# Altium PCB d202.PcbDoc (part 1 of 2)
Units mm, origin at the board's own origin, x right, y up, seen from the top; angles counter-clockwise.
Board outline 40.5 x 50 mm, 2 copper layers (Top Layer, Bottom Layer), stack 1.551 mm thick; 77 components, 78 nets, 375 pads, 19 vias.
Unrouted connection lines stored in the file: 195.
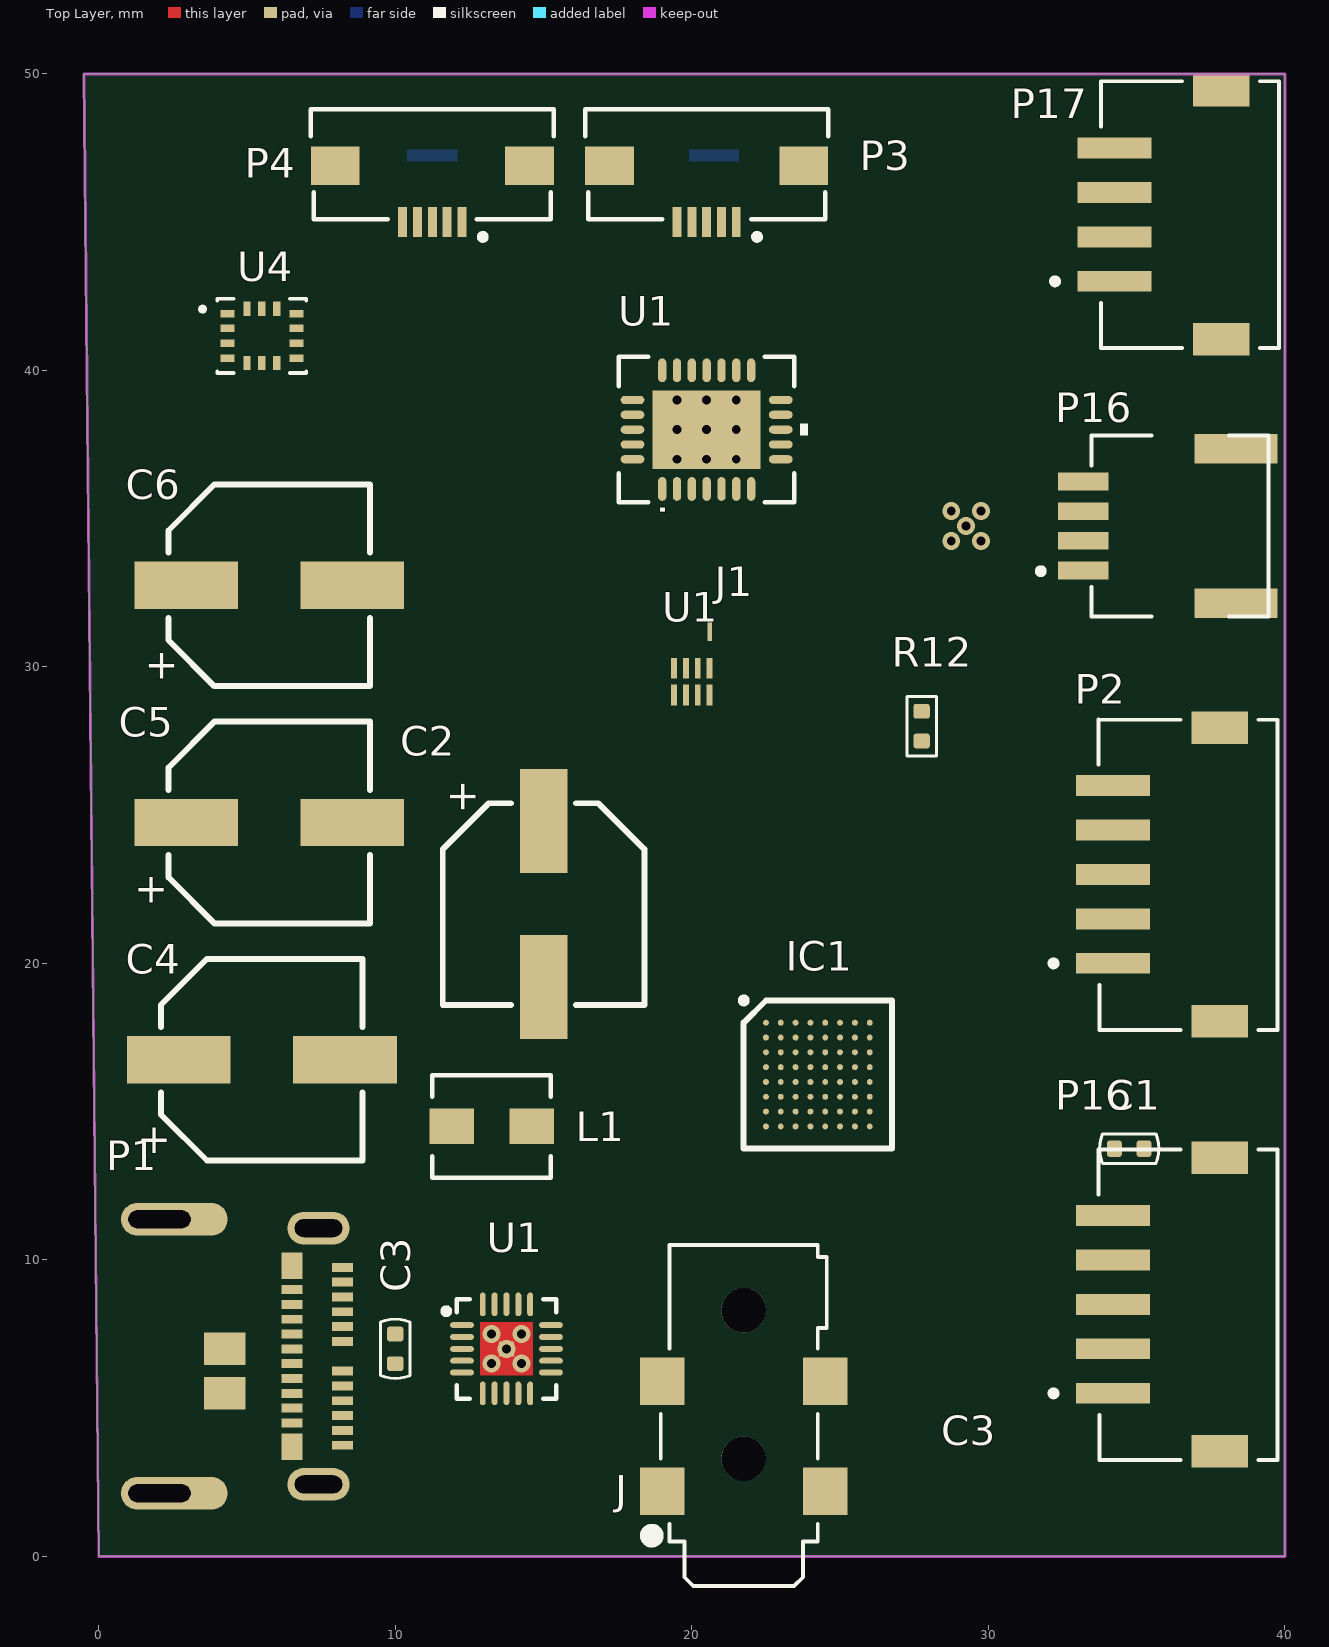
[diagram p0: Top Layer view]
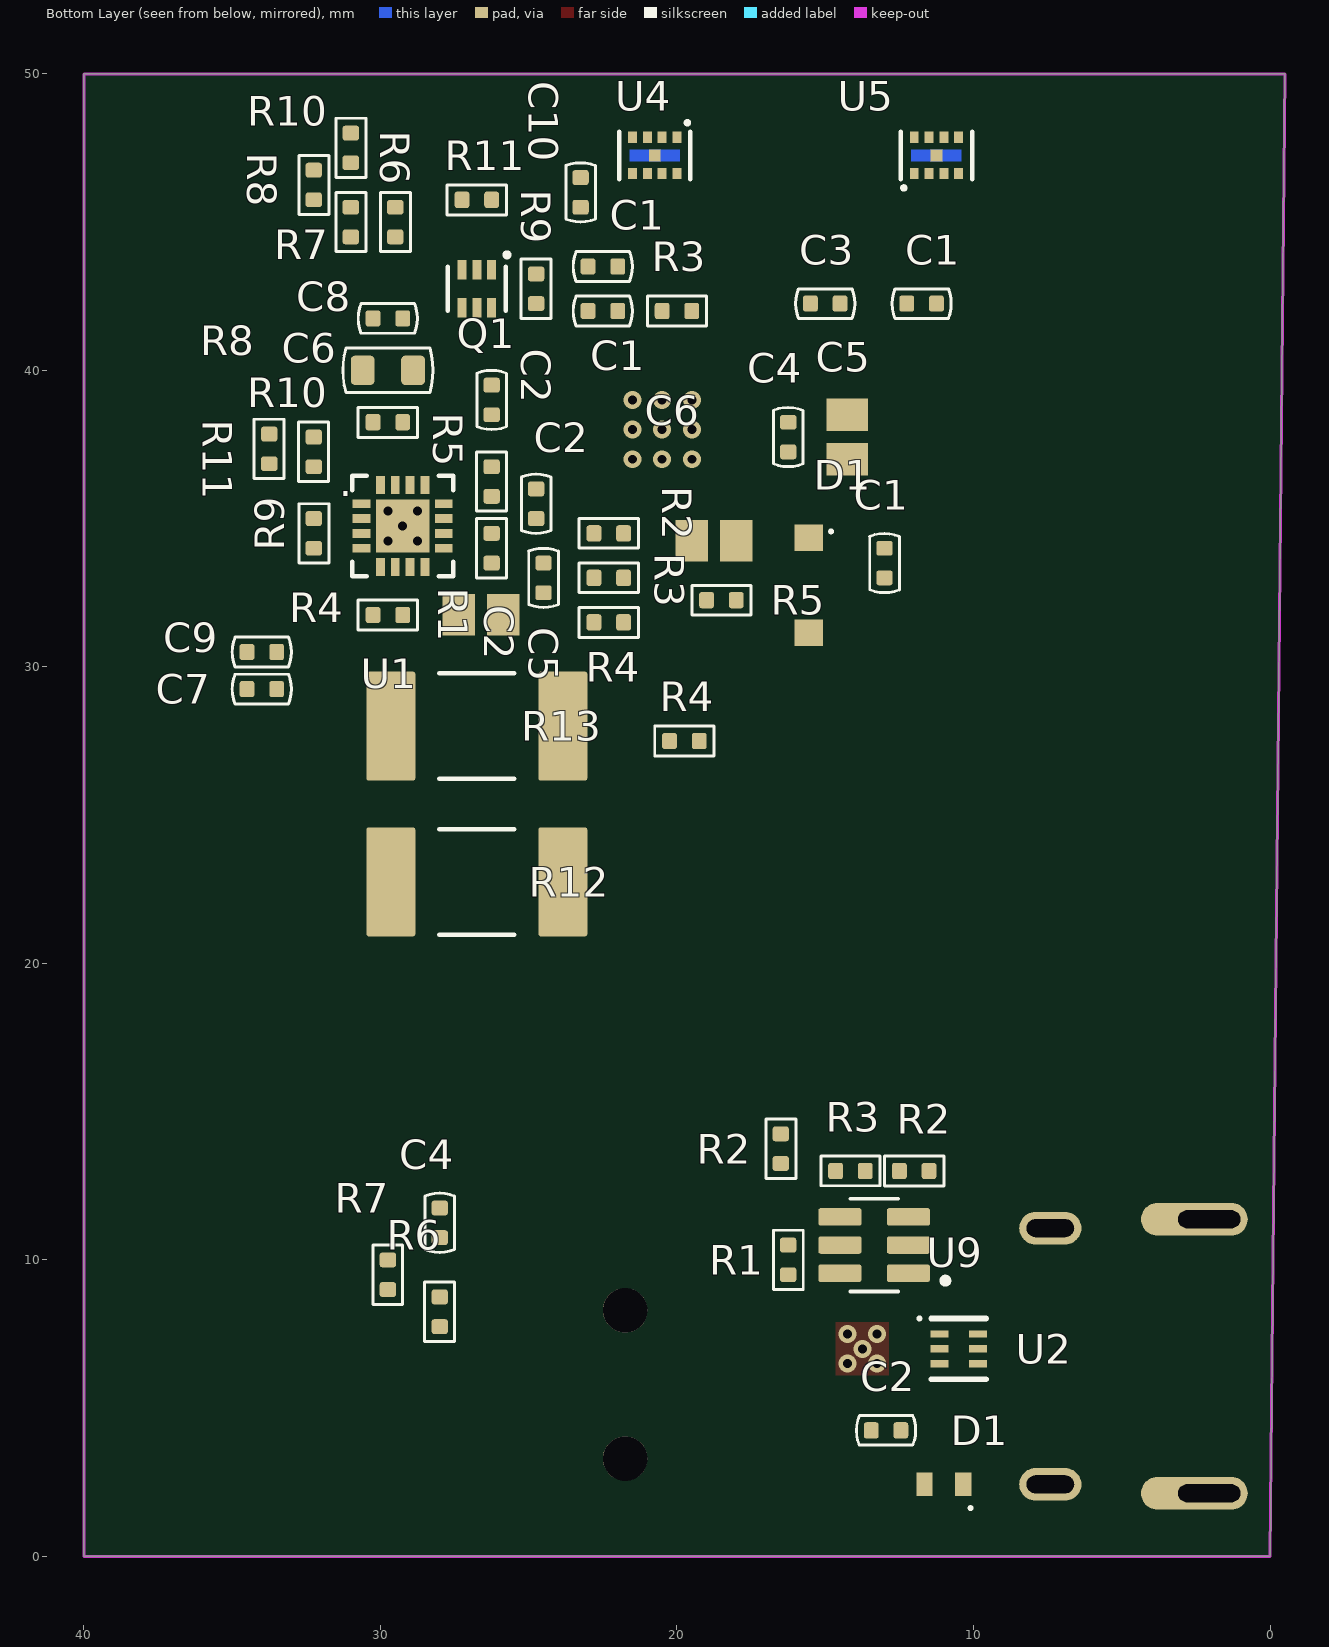
[diagram p1: Bottom Layer view, seen from below]

## Layer stack, top to bottom
Top Solder: solder mask 0.0102, Solder Resist, Dk 3.5
Top Layer: signal copper 0.0356
Dielectric 1: dielectric 1.48, FR-4, Dk 4.8
Bottom Layer: signal copper 0.0356
Bottom Solder: solder mask 0.0102, Solder Resist, Dk 3.5

## Board outline
0,0 40,0 40,50 -0.5,50

## Design rules (kind name [scope] priority, off if disabled: settings)
Clearance [All] p1: gap=0.254 ignorepadtopadclearanceinfootprint=FALSE except(0: Arc-Hole Track-Hole SMDPad-Hole THPad-Hole Via-Hole Fill-Hole Poly-Hole Region-Hole Text-Hole)
DiffPairsRouting [All] p1: maxlimit=0.254 minlimit=0.254 mostfreqgap=0.254 toplayer_minwidth=0.381 toplayer_maxwidth=0.381 toplayer_prefwidth=0.381 bottomlayer_minwidth=0.381 bottomlayer_maxwidth=0.381 bottomlayer_prefwidth=0.381 maxuncoupledlength=12.7
PolygonConnect [All] p1: connectstyle=Relief reliefconductorwidth=0.254 reliefentries=4 polygonreliefangle="90 Angle" airgapwidth=0.254
RoutingVias [All] p1: holewidth=0.711 width=1.27 viastyle="Through Hole" minholewidth=0.711 minwidth=1.27 maxholewidth=0.711 maxwidth=1.27
SolderMaskExpansion [All] p1: expansion=0.102 istentingtop=FALSE
Width [All] p1: maxlimit=0.254 minlimit=0.254 preferedwidth=0.254
29 further rules are at their usual default settings.

## Classes and differential pairs
component class VLT: C3 C5 U1
component class "U_DRV10975 3-ph Sensorless BLDC Motor Driver": C3 C5 C6 D1 J R2 R5 U1
component class TCPP: C2 C3 U1
component class P110: C3 C5 R1 R2 R3 R4 R5 R7 R11 R12 R13 U1
differential pair CONN_D: +CONN_D_P -CONN_D_N
differential pair CMC_D: +CMC_D_P -CMC_D_N

## Components (designator, comment, footprint, x,y, rotation, side; value= is the part's Value field where it differs from the comment)
C1 "CAP CER 1UF 6.3V X5R 0402" C0402 34.75,13.75 r0 top
C1 "CAP CER 0.1UF 50V X7R 0402" C0402 12.999,33.5 r90 bottom
C1 "CAP CER 10nF 25V X7R 10% 0402" C0402 22.5,42 r180 bottom
C1 "CAP CER 1UF 16V X5R 0402" C0402 11.75,42.25 r180 bottom
C1 "CGA2B3X7R1H104K050BB" C0402 22.5,43.5 r180 bottom
C2 "CAP ALUM 68 UF 20% 25 V SMD" WCAP-ASLI_6.3x5.5 15,22 r270 top
C2 "CAP CER 1UF 6.3V X5R 0402" C0402 24.749,35.5 r90 bottom
C2 "CAP CER 1000PF 50V X7R 0402" C0402 26.249,39 r90 bottom
C2 "CAP CER 0.1UF 50V X7R 0402" C0402 12.95,4.25 r180 bottom
C2 "CGA2B3X7R1H104K050BB" C0402 24.499,33 r90 bottom
C3 "CAP CER 1UF 6.3V X5R 0402" C0402 10,7 r90 top
C3 "CAP CER 1UF 6.3V X5R 0402" C0402 15,42.25 r180 bottom
C3 "CAP CER 4.7UF 35V X7R 0805" C0805 4.25,6.25 r90 top
C4 "CAP ALUM 68 UF 20% 25 V SMD" WCAP-ASLI_6.3x5.5 5.5,16.75 r0 top
C4 "CAP CER 0.1UF 50V X7R 0402" C0402 16.249,37.75 r90 bottom
C4 "CAP CER 0.022UF 25V X7R 0402" C0402 28.001,11.25 r270 bottom
C5 "CAP ALUM 68 UF 20% 25 V SMD" WCAP-ASLI_6.3x5.5 5.75,24.75 r0 top
C5 "CAP CER 22UF 25V X5R 0805" C0805 14.25,37.75 r270 bottom
C5 "CAP CER 22UF 25V X5R 0805" C0805 26.61,31.75 r180 bottom
C6 "CAP ALUM 68 UF 20% 25 V SMD" WCAP-ASLI_6.3x5.5 5.75,32.75 r0 top
C6 "CAP CER 2.2UF 16V X5R 0603" C0603 29.75,40 r0 bottom
C6 "CAP CER 10uF X7R 10% 0805" C0805 18.75,34.25 r0 bottom
C7 "CAP CER 0.1UF 50V X7R 0402" C0402 34,29.25 r0 bottom
C8 "CAP CER 1UF 6.3V X5R 0402" C0402 29.75,41.75 r180 bottom
C9 "CAP CER 0.1UF 50V X7R 0402" C0402 34,30.5 r0 bottom
C10 "CAP CER 1UF 6.3V X5R 0402" C0402 23.25,46 r270 bottom
D1 "ESDA25P35-1U1M" ST_QFN_1610 11,2.43 r0 bottom
D1 "Zener Diode 6.2V 2.5W ±5% Surface Mount SOD-123FL" SOD-123 15.558,32.75 r270 bottom
IC1 "STM32G071RBI6" BGA64C50P8X8_500X500X60 24.25,16.25 r0 top
J "SJ2-25964A-SMT-TR" CUI_SJ2-25964A-SMT-TR 21.75,5.5 r90 top
J1 "Net Tie" "Net Tie 6x30mil" 20.6,31.25 r270 top net-tie
L1 "FIXED IND 1UH 5A 24 MOHM SMD" IND_IHLP-1212B00 13.25,14.5 r0 top
P1 "USB" MOLEX_2012670005 4.25,6.75 r270 top
P2 "DC Motor" JST_S5B-ZR-SM4A-TF(LF)(SN) 36,22.25 r90 top
P3 "S201" CONN_0545500571 20.5,46.5 r180 top
P4 "S202" CONN_0545500571 11.25,46.5 r180 top
P16 "DC Motor" JST_S5B-ZR-SM4A-TF(LF)(SN) 36,7.75 r90 top
P16 "DC Motor" "SM04B-NSHSS-TB (LF)(SN)" 35,34.75 r90 top
P17 "DC Motor" JST_S4B-ZR-SM4A-TF(LF)(SN) 36.05,45.25 r90 top (schematic designator P16)
Q1 "DMN32D2LV-7" SON_400UV-7_DIO 26.75,42.75 r270 bottom
R1 "RES SMD 10K OHM 1% 1/16W 0402" R0402 16.25,10 r90 bottom
R1 "RES SMD 68.1K OHM 1% 1/16W 0402" R0402 26.25,34 r270 bottom
R2 "RES SMD 10K OHM 1% 1/16W 0402" R0402 16.5,13.75 r90 bottom
R2 "DNP*" R0402 22.3,34.5 r0 bottom
R2 "RES SMD 18.2K OHM 1% 1/16W 0402" R0402 12,13 r180 bottom
R3 "RES SMD 10K OHM 1% 1/16W 0402" R0402 14.15,13 r0 bottom
R3 "DNP*" R0402 22.3,33 r0 bottom
R3 "RES SMD 18.2K OHM 1% 1/16W 0402" R0402 20,42 r0 bottom
R4 "DNP*" R0402 29.75,31.75 r180 bottom
R4 "RES SMD 4.75K OHM 1% 1/16W 0402" R0402 22.3,31.5 r180 bottom
R4 "RES SMD 360KOHM 1% 1/16W 0402" R0402 19.75,27.5 r180 bottom
R5 "RES SMD 10K OHM 1% 1/16W 0402" R0402 18.5,32.25 r180 bottom
R5 "RES SMD 10K OHM 1% 1/16W 0402" R0402 26.25,36.25 r270 bottom
R6 "RES SMD 10K OHM 1% 1/16W 0402" R0402 29.5,45 r90 bottom
R6 "RES SMD 1K OHM 1% 1/16W 0402" R0402 28,8.25 r270 bottom
R7 "RES SMD 10K OHM 1% 1/16W 0402" R0402 31,45 r90 bottom
R7 "RES SMD 47K OHM 1% 1/16W 0402" R0402 29.75,9.5 r270 bottom
R8 "RES SMD 10K OHM 1% 1/16W 0402" R0402 32.25,46.25 r90 bottom
R8 "RES SMD 10K OHM 1% 1/16W 0402" R0402 29.75,38.25 r180 bottom
R9 "RES SMD 0 OHM JUMPER 1/16W 0402" R0402 24.75,42.75 r270 bottom
R9 "RES SMD 10K OHM 1% 1/16W 0402" R0402 32.25,34.5 r90 bottom
R10 "RES SMD 0 OHM JUMPER 1/16W 0402" R0402 31,47.5 r90 bottom
R10 "RES SMD 10K OHM 1% 1/16W 0402" R0402 32.25,37.25 r270 bottom
R11 "RES SMD 0 OHM JUMPER 1/16W 0402" R0402 26.75,45.75 r180 bottom
R11 "RES SMD 10K OHM 1% 1/16W 0402" R0402 33.75,37.35 r270 bottom
R12 "RES SMD 0 OHM JUMPER 1/16W 0402" R0402 27.75,28 r90 top
R12 "RES SMD 2.2 OHM 5% 1W 2512" R2512 26.75,22.75 r0 bottom
R13 "RES SMD 2.2 OHM 5% 1W 2512" R2512 26.75,28 r0 bottom
U1 "DRV10975ZRHFR" RHF24_2P65X3P65 20.5,38 r90 top
U1 "STSPIN220" VFQFPN-16_STM 29.25,34.75 r180 bottom
U1 "TPD6S300ARUKR" WQFN20_RUK_TEX 13.75,7 r0 top
U1 "TXS0102DQMR" DQM8 20,29.5 r90 top
U2 "ECMF02-2AMX6" QFN-6L 10.5,7 r180 bottom
U4 "BMI270" XDCR_BMI270 5.5,41.163 r0 top
U4 "TPD3F303DPVR" DPV8_1P7X0P4 20.75,47.25 r270 bottom
U5 "TPD3F303DPVR" DPV8_1P7X0P4 11.25,47.25 r90 bottom
U9 "TPS56339DDCR" SOT95P280X110-6N 13.35,10.5 r0 bottom

## Footprints (in the part's own frame and the unit in brackets; to place one, negate y for a bottom-side part, rotate by r counter-clockwise, add the part's x,y. Pads: shape width x height; smd on the part's side, far side on the other; paste and mask are expansions set on the pad)
BGA64C50P8X8_500X500X60 [mm]
  round 0.2 smd: A1(-1.75,1.75) A2(-1.25,1.75) A3(-0.75,1.75) A4(-0.25,1.75) A5(0.25,1.75) A6(0.75,1.75) A7(1.25,1.75) A8(1.75,1.75) B1(-1.75,1.25) B2(-1.25,1.25) B3(-0.75,1.25) B4(-0.25,1.25) B5(0.25,1.25) B6(0.75,1.25) B7(1.25,1.25) B8(1.75,1.25) C1(-1.75,0.75) C2(-1.25,0.75) C3(-0.75,0.75) C4(-0.25,0.75) C5(0.25,0.75) C6(0.75,0.75) C7(1.25,0.75) C8(1.75,0.75) D1(-1.75,0.25) D2(-1.25,0.25) D3(-0.75,0.25) D4(-0.25,0.25) D5(0.25,0.25) D6(0.75,0.25) D7(1.25,0.25) D8(1.75,0.25) E1(-1.75,-0.25) E2(-1.25,-0.25) E3(-0.75,-0.25) E4(-0.25,-0.25) E5(0.25,-0.25) E6(0.75,-0.25) E7(1.25,-0.25) E8(1.75,-0.25) F1(-1.75,-0.75) F2(-1.25,-0.75) F3(-0.75,-0.75) F4(-0.25,-0.75) F5(0.25,-0.75) F6(0.75,-0.75) F7(1.25,-0.75) F8(1.75,-0.75) G1(-1.75,-1.25) G2(-1.25,-1.25) G3(-0.75,-1.25) G4(-0.25,-1.25) G5(0.25,-1.25) G6(0.75,-1.25) G7(1.25,-1.25) G8(1.75,-1.25) H1(-1.75,-1.75) H2(-1.25,-1.75) H3(-0.75,-1.75) H4(-0.25,-1.75) H5(0.25,-1.75) H6(0.75,-1.75) H7(1.25,-1.75) H8(1.75,-1.75)
  silkscreen extent -2.6,-2.5 2.5,2.6, body extent -2.5,-2.5 2.5,2.5, height 0.6
C0402 [mm]
  rrect35% 0.5x0.55 smd: 1(-0.5,0) 2(0.5,0)
  silkscreen extent -1,-0.5 1,0.5, body extent -0.52,-0.28 0.52,0.28, height 0.55
C0603 [mm]
  rrect35% 0.8x0.991 smd: 1(-0.85,0) 2(0.85,0)
  silkscreen extent -1.52,-0.75 1.52,0.75, body extent -0.88,-0.48 0.87,0.47, height 0.87
C0805 [mm] "Chip Capacitor, Body 2.0x1.3mm, IPC High Density"
  rect 1.1x1.4 smd: 1(-0.75,0) 2(0.75,0)
  body extent -1.1,-0.72 1.1,0.72, height 1.4
CONN_0545500571 [mm]
  rect 1.65x1.3 smd mask+0.05: 0(-3.275,-0.4) 0(3.275,-0.4)
  rect 0.3x1 smd mask+0.05: 1(-1,1.5) 2(-0.5,1.5) 3(0,1.5) 4(0.5,1.5) 5(1,1.5)
  silkscreen extent -4.1,-2.3 4.1,2.1, body extent -3.85,-3.3 3.85,1.7, height 1.2
CUI_SJ2-25964A-SMT-TR [mm]
  rect 1.6x1.5 smd: 1(-3.3,2.75) 2(0.4,-2.75) 3(0.4,2.75) 4(-3.3,-2.75)
  round 1.5 hole 1.5 unplated: ""(-2.2,0) ""(2.8,0)
  silkscreen extent -6.5,-2.8 5,3.3, body extent -6.58,-2.96 4.92,3.04, height 3.4
DPV8_1P7X0P4 [mm]
  rect 0.38x0.3 smd paste+0 mask+0.05: 1(-0.61,0.75) 2(-0.61,0.25) 3(-0.61,-0.25) 4(-0.61,-0.75) 5(0.61,-0.75) 6(0.61,-0.25) 7(0.61,0.25) 8(0.61,0.75)
  rect 0.4x0.4 smd paste-0.837 mask+0.05: 9(0,0)
  Top Layer region: -0.2,0.85 0.2,0.85 0.2,-0.85 -0.2,-0.85
  silkscreen extent -1.15,-1.2 0.8,1.2, body extent -0.8,-1.05 0.8,1.05, height 0.65
DQM8 [mm]
  rect 0.7x0.2 smd mask+0.05: 1(-0.45,0.6) 2(-0.45,0.2) 3(-0.45,-0.2) 4(-0.45,-0.6) 5(0.45,-0.6) 6(0.45,-0.2) 7(0.45,0.2) 8(0.45,0.6)
  body extent -0.6,-0.9 0.6,0.9, height 0.5
IND_IHLP-1212B00 [mm]
  rect 1.5x1.2 smd: 1(-1.35,0) 2(1.35,0)
  silkscreen extent -2,-1.73 2,1.73, body extent -1.8,-1.6 1.8,1.6, height 2.06
JST_S4B-ZR-SM4A-TF(LF)(SN) [mm]
  rect 0.7x2.5 smd: 1(-2.25,1.8) 2(-0.75,1.8) 3(0.75,1.8) 4(2.25,1.8)
  rect 1.1x1.9 smd: S1(-4.2,-1.8) S2(4.2,-1.8)
  silkscreen extent -4.5,-3.75 4.5,3.9, body extent -4.44,-3.63 4.55,2.87, height 3.7
JST_S5B-ZR-SM4A-TF(LF)(SN) [mm]
  rect 0.7x2.5 smd: 1(-2.25,1.8) 2(-0.75,1.8) 3(0.75,1.8) 4(2.25,1.8) 5(3.75,1.8)
  rect 1.1x1.9 smd: S1(-4.2,-1.8) S2(5.7,-1.8)
  silkscreen extent -4.5,-3.75 5.98,3.9, body extent -4.49,-3.71 6.01,2.79, height 3.7
MOLEX_2012670005 [mm]
  rect 0.3x0.7 smd: A1(-3,3.97) A2(-2.5,3.97) A3(-2,3.97) A4(-1.5,3.97) A5(-1,3.97) A6(-0.5,3.97) A7(0.5,3.97) A8(1,3.97) A9(1.5,3.97) A10(2,3.97) A11(2.5,3.97) A12(3,3.97) B2(2.25,2.27) B3(1.75,2.27) B4(1.25,2.27) B5(0.75,2.27) B6(0.25,2.27) B7(-0.25,2.27) B8(-0.75,2.27) B9(-1.25,2.27) B10(-1.75,2.27) B11(-2.25,2.27)
  rect 0.9x0.7 smd: B1(3.05,2.27) B12(-3.05,2.27)
  oval 1.1x2.1 hole 0.6 slot 1.6 at 90 deg: S1(-4.32,3.16) S2(4.32,3.16)
  oval 1.1x3.6 hole 0.6 slot 2.1 at 90 deg copper offset 0,0.5: S3(-4.62,-2.2) S4(4.62,-2.2)
  body extent -4.69,-4.15 4.7,4.15, height 3.72
"Net Tie 6x30mil" [mil]
  rect 16x6 smd paste-5 mask-5: 1(-7,0) 2(7,0)
QFN-6L [mm]
  rect 0.6x0.25 smd: 1(-0.65,0.5) 2(-0.65,0) 3(-0.65,-0.5) 4(0.65,-0.5) 5(0.65,0) 6(0.65,0.5)
  silkscreen extent -1.38,-1.03 0.92,1.07, body extent -0.77,-0.87 0.78,0.87, height 0.55
R0402 [mm]
  rrect35% 0.5x0.55 smd: 1(-0.5,0) 2(0.5,0)
  silkscreen extent -1,-0.51 1,0.5, body extent -0.53,-0.25 0.53,0.25, height 0.71
R2512 [mm]
  rrect10% 1.65x3.68 smd: 1(-2.9,0) 2(2.9,0)
  silkscreen extent -1.27,-1.78 1.27,1.78, body extent -3.15,-1.6 3.15,1.6, height 0.71
RHF24_2P65X3P65 [mm] "Plastic Quad Flatpack No-Lead"
  rrect100% 0.8x0.28 smd mask+0.05: 1(-2,1.5) 2(-2,1) 3(-2,0.5) 4(-2,0) 5(-2,-0.5) 6(-2,-1) 7(-2,-1.5) 13(2,-1.5) 14(2,-1) 15(2,-0.5) 16(2,0) 17(2,0.5) 18(2,1) 19(2,1.5)
  rrect100% 0.28x0.8 smd mask+0.05: 8(-1,-2.5) 9(-0.5,-2.5) 10(0,-2.5) 11(0.5,-2.5) 12(1,-2.5) 20(1,2.5) 21(0.5,2.5) 22(0,2.5) 23(-0.5,2.5) 24(-1,2.5)
  rect 2.65x3.65 smd paste-2 mask+0: 25(0,0)
  silkscreen extent -2.46,-3.41 2.46,2.96, body extent -2.13,-2.63 2.13,2.63, height 1
"SM04B-NSHSS-TB (LF)(SN)" [mm]
  rect 0.6x1.7 smd: 1(-1.5,1.8) 2(-0.5,1.8) 3(0.5,1.8) 4(1.5,1.8)
  rect 1x2.8 smd: S1(-2.6,-3.35) S2(2.6,-3.35)
  silkscreen extent -3.05,-4.44 3.05,3.33, body extent -2.95,-4.49 3.05,2.31, height 4.5
SOD-123 [mm]
  rect 0.9x0.95 smd: 1(-1.6,0) 2(1.6,0)
  silkscreen extent -1.87,0.7 -1.77,0.8, body extent -1.82,-0.77 1.83,0.78, height 1.15
SON_400UV-7_DIO [mm]
  rect 0.67x0.3 smd: 1(-0.64,0.5) 2(-0.64,0) 3(-0.64,-0.5) 4(0.64,-0.5) 5(0.64,0) 6(0.64,0.5)
  silkscreen extent -1.19,-0.98 0.75,1.07, body extent -0.8,-0.8 0.8,0.8, height 0.5
SOT95P280X110-6N [mm]
  rrect25% 1.45x0.59 smd: 1(-1.155,0.95) 2(-1.155,0) 3(-1.155,-0.95) 4(1.155,-0.95) 5(1.155,0) 6(1.155,0.95)
  silkscreen extent -2.5,-1.57 0.8,1.57, body extent -1.4,-1.45 1.4,1.45, height 1.1
ST_QFN_1610 [mm]
  rect 0.55x0.8 smd: 1(-0.65,0) 2(0.65,0)
  silkscreen extent -0.95,0.75 -0.85,0.85, body extent -0.85,-0.55 0.85,0.55, height 0.6
VFQFPN-16_STM [mm]
  rect 0.6x0.3 smd mask+0.05: 1(-1.385,0.75) 2(-1.385,0.25) 3(-1.385,-0.25) 4(-1.385,-0.75) 9(1.385,-0.75) 10(1.385,-0.25) 11(1.385,0.25) 12(1.385,0.75)
  rect 0.3x0.6 smd mask+0.05: 5(-0.75,-1.385) 6(-0.25,-1.385) 7(0.25,-1.385) 8(0.75,-1.385) 13(0.75,1.385) 14(0.25,1.385) 15(-0.25,1.385) 16(-0.75,1.385)
  rect 1.8x1.8 smd mask+0.05: 17(0,0)
  silkscreen extent -1.7,-1.7 1.7,1.7, body extent -1.57,-1.57 1.58,1.58, height 0.94
WCAP-ASLI_6.3x5.5 [mm]
  rect 3.5x1.6 smd: 1(-2.8,0) 2(2.8,0)
  silkscreen extent -3.4,-3.4 3.4,3.4, body extent -3.65,-3.3 3.65,3.3, height 5.5
WQFN20_RUK_TEX [mm]
  rrect100% 0.8x0.2 smd mask+0.05: 1(-1.5,0.8) 2(-1.5,0.4) 3(-1.5,0) 4(-1.5,-0.4) 5(-1.5,-0.8) 11(1.5,-0.8) 12(1.5,-0.4) 13(1.5,0) 14(1.5,0.4) 15(1.5,0.8)
  rrect100% 0.2x0.8 smd mask+0.05: 6(-0.8,-1.5) 7(-0.4,-1.5) 8(0,-1.5) 9(0.4,-1.5) 10(0.8,-1.5) 16(0.8,1.5) 17(0.4,1.5) 18(0,1.5) 19(-0.4,1.5) 20(-0.8,1.5)
  rect 0.5x0.5 smd paste-2 mask+0.05: 21(0,0)
  Top Layer region: -0.9,-0.9 0.9,-0.9 0.9,0.9 -0.9,0.9
  silkscreen extent -2.13,-1.68 1.68,1.68, body extent -1.5,-1.5 1.5,1.5, height 0.8
XDCR_BMI270 [mm]
  rect 0.475x0.25 smd: 1(-1.162,0.75) 2(-1.162,0.25) 3(-1.162,-0.25) 4(-1.162,-0.75) 8(1.162,-0.75) 9(1.162,-0.25) 10(1.162,0.25) 11(1.162,0.75)
  rect 0.25x0.475 smd: 5(-0.5,-0.913) 6(0,-0.913) 7(0.5,-0.913) 12(0.5,0.913) 13(0,0.913) 14(-0.5,0.913)
  silkscreen extent -2.07,-1.25 1.5,1.25, body extent -1.5,-1.25 1.5,1.25, height 0.86

## Part data
C1: "1µF ±10% 6.3V Ceramic Capacitor X5R 0402 (1005 Metric)", Capacitance=100nF, Case Code (Imperial)=0402, Case Code (Metric)=1005, Dielectric=X5R, Dielectric Material=Ceramic, Manufacturer=Yageo, Manufacturer Part Number=CC0402KRX5R5BB105, Max Operating Temperature=85°C, Min Operating Temperature=-55°C, Package Quantity=1, Supplier Part Number 1=311-1438-1-ND, Tolerance=10%, Voltage Rating=50V, Voltage Rating (DC)=6.3V, Case/Package=0402, ComponentLink1Description=http://www.farnell.com/datasheets/70765.pdf?src-supplier=Farnell, ComponentLink1URL=http://www.farnell.com/datasheets/70765.pdf?src-supplier=Farnell, ComponentLink2Description=http://www.yageo.com/documents/recent/UPY-GPHC_X5R_4V-to-50V_25.pdf?src-supplier=Digi-Key, ComponentLink2URL=http://www.yageo.com/documents/recent/UPY-GPHC_X5R_4V-to-50V_25.pdf?src-supplier=Digi-Key, ComponentLink3Description=http://www.farnell.com/datasheets/2167237.pdf?src-supplier=Element14, ComponentLink3URL=http://www.farnell.com/datasheets/2167237.pdf?src-supplier=Element14, ComponentLink4Description=http://www.yageo.com/documents/recent/UPY-GPHC_X5R_4V-to-50V_12.pdf?src-supplier=Avnet+Europe, ComponentLink4URL=http://www.yageo.com/documents/recent/UPY-GPHC_X5R_4V-to-50V_12.pdf?src-supplier=Avnet+Europe, ComponentLink5Description=http://www.farnell.com/datasheets/1359354.pdf?src-supplier=Element14, ComponentLink5URL=http://www.farnell.com/datasheets/1359354.pdf?src-supplier=Element14, ComponentLink6Description=http://www.farnell.com/datasheets/70765.pdf?src-supplier=Element14, ComponentLink6URL=http://www.farnell.com/datasheets/70765.pdf?src-supplier=Element14, ComponentLink7Description=http://www.yageo.com/documents/recent/UPY-GPHC_X5R_4V-to-50V_12.pdf?src-supplier=Avnet, ComponentLink7URL=http://www.yageo.com/documents/recent/UPY-GPHC_X5R_4V-to-50V_12.pdf?src-supplier=Avnet, Composition=Ceramic, Depth=0.5mm, Halogen Free="Halogen Free", Height=0.5mm, Lead Free="Lead Free", Length=1mm, Mount="Surface Mount", Number of Pins=2, Packaging="Tape and Reel", Pricing 1="1=0.1, 10=0.05, 50=0.0272, 100=0.0222, 500=0.0158, 1000=0.0124, 2500=0.0113, 5000=0.0104 (USD)", Radiation Hardening=No, REACH SVHC="No SVHC", Stock 1=34926286, Supplier 1=Digi-Key, Termination=SMD/SMT, Thickness=0.022inch, Width=0.02inch
C1 C2 C4 C7 C9: "0.1µF ±10% 50V Ceramic Capacitor X7R 0402 (1005 Metric)", Capacitance=100nF, Case Code (Imperial)=0402, Case Code (Metric)=1005, Dielectric=X7R, Manufacturer=TDK, Manufacturer Part Number=CGA2B3X7R1H104K050BB, Max Operating Temperature=125°C, Min Operating Temperature=-55°C, Package Quantity=1, Ratings=AEC-Q200, Supplier Part Number 1=445-6899-1-ND, Tolerance=10%, Voltage=50V, Case/Package=0402, ComponentLink1Description=http://product.tdk.com/capacitor/mlcc/en/documents/mlccspec_automotive_general_midvoltage_en.pdf?src-supplier=Future+Electronics, ComponentLink1URL=http://product.tdk.com/capacitor/mlcc/en/documents/mlccspec_automotive_general_midvoltage_en.pdf?src-supplier=Future+Electronics, ComponentLink2Description=http://www.farnell.com/datasheets/1807242.pdf?src-supplier=Element14, ComponentLink2URL=http://www.farnell.com/datasheets/1807242.pdf?src-supplier=Element14, ComponentLink3Description=http://www.mouser.com/ds/2/400/lcc_automotive_general_en-843974.pdf?src-supplier=Mouser, ComponentLink3URL=http://www.mouser.com/ds/2/400/lcc_automotive_general_en-843974.pdf?src-supplier=Mouser, ComponentLink4Description=http://www.farnell.com/datasheets/1936565.pdf?src-supplier=Element14, ComponentLink4URL=http://www.farnell.com/datasheets/1936565.pdf?src-supplier=Element14, ComponentLink5Description=http://www.farnell.com/datasheets/1735392.pdf?src-supplier=Element14, ComponentLink5URL=http://www.farnell.com/datasheets/1735392.pdf?src-supplier=Element14, Composition=Ceramic, Depth=0.5mm, Height=0.5mm, Lead Free="Lead Free", Length=1mm, Mount="Surface Mount", Packaging="Tape and Reel", Pricing 1="1=0.17, 10=0.118, 50=0.0668, 100=0.0553, 500=0.0388, 1000=0.0321, 2500=0.0299, 5000=0.0273 (USD)", REACH SVHC="No SVHC", Stock 1=2925303, Supplier 1=Digi-Key, Termination=SMD/SMT, Thickness=0.022inch, Voltage Rating=50V, Voltage Rating (DC)=50V, Weight=2.3E-05oz, Width=0.02inch
C1: "Cap Cer 10nF 25V X7R 10% 0402", Capacitance=10nF, Case Code (Imperial)=0402, Case Code (Metric)=1005, Dielectric=X7R, Insulation Resistance=100GR, Manufacturer="Kyocera AVX", Manufacturer Part Number=04023C103KAT2A, Max Operating Temperature=125°C, Min Operating Temperature=-55°C, Package Quantity=1, Supplier Part Number 1=478-1113-1-ND, Tolerance=10%, Voltage=25V, Case/Package=0402, ComponentLink1Description=http://www.farnell.com/datasheets/2237835.pdf?src-supplier=Element14, ComponentLink1URL=http://www.farnell.com/datasheets/2237835.pdf?src-supplier=Element14, ComponentLink2Description=http://catalogs.avx.com/SurfaceMount.pdf?src-supplier=Digi-Key, ComponentLink2URL=http://catalogs.avx.com/SurfaceMount.pdf?src-supplier=Digi-Key, ComponentLink3Description=http://www.alliedelec.com/m/d/a24bb5190bea413b2ff164816f55e87c.pdf?src-supplier=Allied+Electronics, ComponentLink3URL=http://www.alliedelec.com/m/d/a24bb5190bea413b2ff164816f55e87c.pdf?src-supplier=Allied+Electronics, ComponentLink4Description=http://uk.rs-online.com/webdocs/13ec/0900766b813ece35.pdf?src-supplier=RSComponents, ComponentLink4URL=http://uk.rs-online.com/webdocs/13ec/0900766b813ece35.pdf?src-supplier=RSComponents, Depth=0.5mm, Dissipation Factor=12.5%, Height=0.56mm, Lead Free="Lead Free", Length=1mm, Mount="Surface Mount", Packaging="Tape and Reel", Pricing 1="1=0.1, 10=0.034, 50=0.0182, 100=0.0149, 500=0.0107, 1000=0.0084, 2500=0.0076, 5000=0.007 (USD)", Radiation Hardening=No, REACH SVHC="No SVHC", Stock 1=1015537, Supplier 1=Digi-Key, Termination=SMD/SMT, Thickness=0.022inch, Voltage Rating=25V, Voltage Rating (DC)=25V, Width=0.02inch
C1: "1µF ±10% 16V Ceramic Capacitor X5R 0402 (1005 Metric)", Capacitance=1uF, Case Code (Imperial)=0402, Case Code (Metric)=1005, Dielectric=X5R, Manufacturer=Yageo, Manufacturer Part Number=CC0402KRX5R7BB105, Max Operating Temperature=85°C, Min Operating Temperature=-55°C, Supplier Part Number 1=311-1691-1-ND, Tolerance=10%, Voltage Rating=16V, Case/Package=0402, ComponentLink1Description=http://www.yageo.com/documents/recent/UPY-GPHC_X5R_4V-to-50V_12.pdf?src-supplier=Avnet+Europe, ComponentLink1URL=http://www.yageo.com/documents/recent/UPY-GPHC_X5R_4V-to-50V_12.pdf?src-supplier=Avnet+Europe, Composition=Ceramic, Depth=0.5mm, Halogen Free="Halogen Free", Height=0.5mm, Lead Free="Lead Free", Length=1mm, Mount="Surface Mount", Packaging="Tape and Reel", Pricing 1="1=0.4, 10=0.278, 100=0.167, 500=0.1253, 1000=0.1058, 2500=0.1002, 5000=0.0947 (USD)", Radiation Hardening=No, Stock 1=1114963, Supplier 1=Digi-Key, Termination=SMD/SMT, Thickness=0.022inch, Voltage Rating (DC)=16V, Weight=2.3E-05oz, Width=0.02inch
C1 C2: library part "CAP CER 0.1UF 50V X7R 0402", "0.1µF ±10% 50V Ceramic Capacitor X7R 0402 (1005 Metric)", Capacitance=100nF, Case Code (Imperial)=0402, Case Code (Metric)=1005, Dielectric=X7R, Manufacturer=TDK, Max Operating Temperature=125°C, Min Operating Temperature=-55°C, Package Quantity=1, Ratings=AEC-Q200, Supplier Part Number 1=445-6899-1-ND, Tolerance=10%, Voltage=50V, Case/Package=0402, ComponentLink1Description=http://product.tdk.com/capacitor/mlcc/en/documents/mlccspec_automotive_general_midvoltage_en.pdf?src-supplier=Future+Electronics, ComponentLink1URL=http://product.tdk.com/capacitor/mlcc/en/documents/mlccspec_automotive_general_midvoltage_en.pdf?src-supplier=Future+Electronics, ComponentLink2Description=http://www.farnell.com/datasheets/1807242.pdf?src-supplier=Element14, ComponentLink2URL=http://www.farnell.com/datasheets/1807242.pdf?src-supplier=Element14, ComponentLink3Description=http://www.mouser.com/ds/2/400/lcc_automotive_general_en-843974.pdf?src-supplier=Mouser, ComponentLink3URL=http://www.mouser.com/ds/2/400/lcc_automotive_general_en-843974.pdf?src-supplier=Mouser, ComponentLink4Description=http://www.farnell.com/datasheets/1936565.pdf?src-supplier=Element14, ComponentLink4URL=http://www.farnell.com/datasheets/1936565.pdf?src-supplier=Element14, ComponentLink5Description=http://www.farnell.com/datasheets/1735392.pdf?src-supplier=Element14, ComponentLink5URL=http://www.farnell.com/datasheets/1735392.pdf?src-supplier=Element14, Composition=Ceramic, Depth=0.5mm, Height=0.5mm, Lead Free="Lead Free", Length=1mm, Manufacturer Part Number=CGA2B3X7R1H104K050BB, Mount="Surface Mount", Packaging="Tape and Reel", Pricing 1="1=0.17, 10=0.118, 50=0.0668, 100=0.0553, 500=0.0388, 1000=0.0321, 2500=0.0299, 5000=0.0273 (USD)", REACH SVHC="No SVHC", Stock 1=2925303, Supplier 1=Digi-Key, Termination=SMD/SMT, Thickness=0.022inch, Voltage Rating=50V, Voltage Rating (DC)=50V, Weight=2.3E-05oz, Width=0.02inch
C2 C4 C5 C6: "68µF 25V Aluminum Electrolytic Capacitors Radial, Can - SMD  2000 Hrs @ 105°C", Capacitance=68uF, Capacitance Tolerance=+/-20%, Leakage Current=17uA, Manufacturer="Wurth Elektronik", Manufacturer Part Number=865080443009, Operating Temperature="-55 to +105degC", Rated Voltage=25V, Ripple Current=240mA, Supplier Part Number 1=732-8437-1-ND, ComponentLink1Description=Manufacturer, ComponentLink1URL=http://www.we-online.de, ComponentLink2Description=Datasheet, ComponentLink2URL=https://www.we-online.com/catalog/datasheet/865080443009.pdf, Diameter=6.3mm, Dissipation Factor=14%, Endurance=2000h, Height=5.5mm, Mount="Surface Mount", Mounting Technology=SMT, Packaging="Tape and Reel", Published Date="May 2020", Supplier 1=Digi-Key, Technical Reference=ASED055680M025DVCTBB000
C2 C3 C3 C8 C10: "1µF ±10% 6.3V Ceramic Capacitor X5R 0402 (1005 Metric)", Capacitance=1uF, Case Code (Imperial)=0402, Case Code (Metric)=1005, Dielectric=X5R, Dielectric Material=Ceramic, Manufacturer=Yageo, Manufacturer Part Number=CC0402KRX5R5BB105, Max Operating Temperature=85°C, Min Operating Temperature=-55°C, Package Quantity=1, Supplier Part Number 1=311-1438-1-ND, Tolerance=10%, Voltage Rating=6.3V, Case/Package=0402, ComponentLink1Description=http://www.farnell.com/datasheets/70765.pdf?src-supplier=Farnell, ComponentLink1URL=http://www.farnell.com/datasheets/70765.pdf?src-supplier=Farnell, ComponentLink2Description=http://www.yageo.com/documents/recent/UPY-GPHC_X5R_4V-to-50V_25.pdf?src-supplier=Digi-Key, ComponentLink2URL=http://www.yageo.com/documents/recent/UPY-GPHC_X5R_4V-to-50V_25.pdf?src-supplier=Digi-Key, ComponentLink3Description=http://www.farnell.com/datasheets/2167237.pdf?src-supplier=Element14, ComponentLink3URL=http://www.farnell.com/datasheets/2167237.pdf?src-supplier=Element14, ComponentLink4Description=http://www.yageo.com/documents/recent/UPY-GPHC_X5R_4V-to-50V_12.pdf?src-supplier=Avnet+Europe, ComponentLink4URL=http://www.yageo.com/documents/recent/UPY-GPHC_X5R_4V-to-50V_12.pdf?src-supplier=Avnet+Europe, ComponentLink5Description=http://www.farnell.com/datasheets/1359354.pdf?src-supplier=Element14, ComponentLink5URL=http://www.farnell.com/datasheets/1359354.pdf?src-supplier=Element14, ComponentLink6Description=http://www.farnell.com/datasheets/70765.pdf?src-supplier=Element14, ComponentLink6URL=http://www.farnell.com/datasheets/70765.pdf?src-supplier=Element14, ComponentLink7Description=http://www.yageo.com/documents/recent/UPY-GPHC_X5R_4V-to-50V_12.pdf?src-supplier=Avnet, ComponentLink7URL=http://www.yageo.com/documents/recent/UPY-GPHC_X5R_4V-to-50V_12.pdf?src-supplier=Avnet, Composition=Ceramic, Depth=0.5mm, Halogen Free="Halogen Free", Height=0.5mm, Lead Free="Lead Free", Length=1mm, Mount="Surface Mount", Number of Pins=2, Packaging="Tape and Reel", Pricing 1="1=0.1, 10=0.05, 50=0.0272, 100=0.0222, 500=0.0158, 1000=0.0124, 2500=0.0113, 5000=0.0104 (USD)", Radiation Hardening=No, REACH SVHC="No SVHC", Stock 1=34926286, Supplier 1=Digi-Key, Termination=SMD/SMT, Thickness=0.022inch, Voltage Rating (DC)=6.3V, Width=0.02inch
C2: "1000pF ±10% 50V Ceramic Capacitor X7R 0402 (1005 Metric)", Capacitance=1nF, Case/Package=0402, Dielectric=X7R, Dielectric Material=Ceramic, Manufacturer=TDK-Lambda, Manufacturer Part Number=C0402C102K5RACTU, Supplier Part Number 1=399-1032-6-ND, Tolerance=10%, Voltage Rating (DC)=50V, ComponentLink1Description=http://www.onlinecomponents.com/productFiles/mf-KEM/kem_c1002_x7r_smd.pdf?src-supplier=Onlinecomponents.com, ComponentLink1URL=http://www.onlinecomponents.com/productFiles/mf-KEM/kem_c1002_x7r_smd.pdf?src-supplier=Onlinecomponents.com, Height=500um, Length=1mm, Mount="Surface Mount", Number of Pins=2, Packaging="Cut Tape", Pricing 1="1=0.1, 10=0.021, 50=0.0116, 100=0.0095, 500=0.0068, 1000=0.0053, 2500=0.0048, 5000=0.0045 (USD)", REACH SVHC="No SVHC", Stock 1=1578852, Supplier 1=Digi-Key, Width=500um
C3: Capacitance=4.7uF, Case Code (Imperial)=0805, Case Code (Metric)=2012, Dielectric=X7R, Dielectric Material=Ceramic, Manufacturer=TDK, Manufacturer Part Number=C2012X7R1V475K125AC, Max Operating Temperature=125°C, Min Operating Temperature=-55°C, Package Quantity=2000, Supplier Part Number 1=445-7555-1-ND, Tolerance=10%, Voltage Rating=35V, Case/Package=0805, ComponentLink1Description=http://www.farnell.com/datasheets/2792994.pdf?src-supplier=Element14, ComponentLink1URL=http://www.farnell.com/datasheets/2792994.pdf?src-supplier=Element14, ComponentLink2Description=https://product.tdk.com/info/en/catalog/datasheets/mlcc_commercial_general_en.pdf?src-supplier=Digi-Key, ComponentLink2URL=https://product.tdk.com/info/en/catalog/datasheets/mlcc_commercial_general_en.pdf?src-supplier=Digi-Key, ComponentLink3Description=https://product.tdk.com/info/en/catalog/spec/mlccspec_commercial_general_midvoltage_en.pdf?src-supplier=Digi-Key, ComponentLink3URL=https://product.tdk.com/info/en/catalog/spec/mlccspec_commercial_general_midvoltage_en.pdf?src-supplier=Digi-Key, Depth=1.25mm, Height=1.25mm, Lead Free="Lead Free", Length=2mm, Mount="Surface Mount", Packaging="Tape and Reel", Pricing 1="1=0.73, 10=0.519, 50=0.3752, 100=0.3416, 500=0.253, 1000=0.2151 (USD)", Radiation Hardening=No, REACH SVHC="No SVHC", Stock 1=109602, Supplier 1=Digi-Key, Termination=SMD/SMT, Thickness=0.057inch, Voltage Rating (DC)=35V, Weight=0.000194oz, Width=0.049inch
C4: "0.022µF ±10% 25V Ceramic Capacitor X7R 0402 (1005 Metric)", Capacitance=22nF, Case Code (Imperial)=0402, Case Code (Metric)=1005, Dielectric=X7R, Manufacturer=TDK, Manufacturer Part Number=CGA2B2X7R1E223K050BA, Max Operating Temperature=125°C, Min Operating Temperature=-55°C, Package Quantity=1, Ratings=AEC-Q200, Supplier Part Number 1=445-5609-1-ND, Tolerance=10%, Voltage Rating=25V, Case/Package=0402, ComponentLink1Description=http://www.mouser.com/ds/2/400/lcc_automotive_general_en-843974.pdf?src-supplier=Mouser, ComponentLink1URL=http://www.mouser.com/ds/2/400/lcc_automotive_general_en-843974.pdf?src-supplier=Mouser, Composition=Ceramic, Depth=0.5mm, Height=0.5mm, Length=1mm, Mount="Surface Mount", Packaging="Tape and Reel", Pricing 1="1=0.1, 10=0.057, 50=0.0312, 100=0.0255, 500=0.0182, 1000=0.0143, 2500=0.013, 5000=0.012 (USD)", REACH SVHC="No SVHC", Stock 1=330320, Supplier 1=Digi-Key, Termination=SMD/SMT, Thickness=0.022inch, Voltage Rating (DC)=25V, Weight=2.3E-05oz, Width=0.5mm
C5 C5: "22µF ±20% 25V Ceramic Capacitor X5R 0805 (2012 Metric)", Capacitance=22uF, Case Code (Imperial)=0805, Case Code (Metric)=2012, Dielectric=X5R, Manufacturer=Yageo, Manufacturer Part Number=CC0805MKX5R8BB226, Max Operating Temperature=85°C, Min Operating Temperature=-55°C, Package Quantity=3000, Supplier Part Number 1=311-1903-1-ND, Tolerance=20%, Voltage Rating=25V, Case/Package=0805, ComponentLink1Description=http://www.yageo.com/documents/recent/UPY-GPHC_X5R_4V-to-50V_25.pdf?src-supplier=Digi-Key, ComponentLink1URL=http://www.yageo.com/documents/recent/UPY-GPHC_X5R_4V-to-50V_25.pdf?src-supplier=Digi-Key, ComponentLink2Description=http://www.mouser.com/ds/2/447/Yageo_UPY-GP_NP0_16V-to-50V_9-358835.pdf?src-supplier=Mouser, ComponentLink2URL=http://www.mouser.com/ds/2/447/Yageo_UPY-GP_NP0_16V-to-50V_9-358835.pdf?src-supplier=Mouser, Halogen Free="Halogen Free", Height=1.25mm, Lead Free="Lead Free", Length=0.079inch, Mount="Surface Mount", Packaging="Tape and Reel", Pricing 1="1=0.5, 10=0.353, 50=0.267, 100=0.2325, 500=0.1722, 1000=0.1464 (USD)", Stock 1=1060, Supplier 1=Digi-Key, Termination=SMD/SMT, Thickness=0.057inch, Voltage Rating (DC)=25V, Weight=0.000194oz, Width=0.049inch
C6: "2.2µF ±10% 16V Ceramic Capacitor X5R 0603 (1608 Metric)", Capacitance=2.2uF, Case Code (Imperial)=0603, Case Code (Metric)=1608, Dielectric=X5R, Manufacturer=Yageo, Manufacturer Part Number=CC0603KRX5R7BB225, Max Operating Temperature=85°C, Min Operating Temperature=-55°C, Supplier Part Number 1=311-1784-1-ND, Tolerance=10%, Voltage Rating=16V, Case/Package=0603, ComponentLink1Description=http://www.farnell.com/datasheets/2167237.pdf?src-supplier=Element14, ComponentLink1URL=http://www.farnell.com/datasheets/2167237.pdf?src-supplier=Element14, Composition=Ceramic, Depth=0.8mm, Halogen Free="Halogen Free", Height=0.8mm, Lead Free="Lead Free", Length=1.6mm, Mount="Surface Mount", Packaging="Tape and Reel", Pricing 1="1=0.19, 10=0.132, 100=0.0667, 500=0.0456, 1000=0.0404 (USD)", Radiation Hardening=No, REACH SVHC=Unknown, Stock 1=126369, Supplier 1=Digi-Key, Termination=SMD/SMT, Thickness=0.035inch, Voltage Rating (DC)=16V, Width=0.031inch
C6: "Capacitor,10uF,10V,X7R,10%,0805,Murata", Capacitance=10uF, Case Code (Imperial)=0805, Case Code (Metric)=2012, Dielectric=X7R, Manufacturer=Murata, Manufacturer Part Number=GRM21BR71A106KA73L, Max Operating Temperature=125°C, Min Operating Temperature=-55°C, Package Quantity=3000, Supplier Part Number 1=490-10516-1-ND, Tolerance=10%, Voltage Rating=10V, Case/Package=0805, ComponentLink1Description=http://components.arrow.com/part/dataview/0323_07281730?src-supplier=Arrow+Europe, ComponentLink1URL=http://components.arrow.com/part/dataview/0323_07281730?src-supplier=Arrow+Europe, ComponentLink2Description=http://www.mouser.com/ds/2/281/c02e-2905.pdf?src-supplier=Mouser, ComponentLink2URL=http://www.mouser.com/ds/2/281/c02e-2905.pdf?src-supplier=Mouser, ComponentLink3Description=http://www.farnell.com/datasheets/2079188.pdf?src-supplier=Newark, ComponentLink3URL=http://www.farnell.com/datasheets/2079188.pdf?src-supplier=Newark, ComponentLink4Description=http://www.farnell.com/datasheets/2079188.pdf?src-supplier=Farnell, ComponentLink4URL=http://www.farnell.com/datasheets/2079188.pdf?src-supplier=Farnell, ComponentLink5Description=http://www.farnell.com/datasheets/2079188.pdf?src-supplier=Element14, ComponentLink5URL=http://www.farnell.com/datasheets/2079188.pdf?src-supplier=Element14, ComponentLink6Description=http://search.murata.co.jp/Ceramy/image/img/A01X/G101/ENG/GRM21BR71A106KA73-01.pdf?src-supplier=Digi-Key, ComponentLink6URL=http://search.murata.co.jp/Ceramy/image/img/A01X/G101/ENG/GRM21BR71A106KA73-01.pdf?src-supplier=Digi-Key, Depth=1.25mm, Height=1.25mm, Length=2mm, Mount="Surface Mount", Packaging="Tape and Reel", Pricing 1="1=0.26, 10=0.176, 100=0.089, 500=0.0609, 1000=0.0538 (USD)", REACH SVHC="No SVHC", Stock 1=2099435, Supplier 1=Digi-Key, Termination=SMD/SMT, Thickness=0.055inch, Voltage Rating (DC)=10V, Weight=0.000335oz, Width=1.25mm
D1: library part "TVS DIODE ESDA25P35-1U1M 22V 41V 1610", "41V Clamp 35A (8/20µs) Ipp Tvs Diode Surface Mount 1610", Case/Package=1610, Clamping Voltage=41V, Manufacturer=STMicroelectronics, Max Operating Temperature=150°C, Min Breakdown Voltage=23.3V, Min Operating Temperature=-55°C, Peak Pulse Current=35A, Peak Pulse Power=1.4kW, Power Line Protection=No, Reverse Standoff Voltage=22V, Supplier Part Number 1=497-16913-1-ND, ComponentLink1Description=http://www.st.com/content/ccc/resource/technical/document/datasheet/group3/e4/43/53/b9/4e/8a/40/bb/DM00312034/files/DM00312034.pdf/jcr:content/translations/en.DM00312034.pdf?src-supplier=Digi-Key, ComponentLink1URL=http://www.st.com/content/ccc/resource/technical/document/datasheet/group3/e4/43/53/b9/4e/8a/40/bb/DM00312034/files/DM00312034.pdf/jcr:content/translations/en.DM00312034.pdf?src-supplier=Digi-Key, ComponentLink2Description=http://www.farnell.com/datasheets/2236209.pdf?src-supplier=Farnell, ComponentLink2URL=http://www.farnell.com/datasheets/2236209.pdf?src-supplier=Farnell, ComponentLink3Description=http://www.farnell.com/datasheets/2236209.pdf?src-supplier=Element14, ComponentLink3URL=http://www.farnell.com/datasheets/2236209.pdf?src-supplier=Element14, ComponentLink4Description=http://www.farnell.com/datasheets/2236209.pdf?src-supplier=Newark, ComponentLink4URL=http://www.farnell.com/datasheets/2236209.pdf?src-supplier=Newark, Composition=Zener, Manufacturer Part Number=ESDA25P35-1U1M, Mount="Surface Mount", Number of Pins=2, Number of Unidirectional Channels=1, Packaging="Tape and Reel", Pricing 1="1=0.45, 10=0.362, 25=0.3312, 100=0.2079, 250=0.2056, 500=0.1925, 1000=0.1309, 2500=0.1255 (USD)", Stock 1=12413, Supplier 1=Digi-Key
D1: library part "DIODE ZENER 6.2V 2.5W SOD123FL", Case/Package=SOD-123-2, Leakage Current=5uA, Manufacturer="ON Semiconductor", Manufacturer Part Number=1SMF5920BT1G, Max Operating Temperature=150°C, Max Power Dissipation=2.5W, Min Operating Temperature=-55°C, Package Quantity=3000, Supplier Part Number 1=1SMF5920BT1GOSCT-ND, Tolerance=5%, Working Voltage=4V, Zener Voltage=6.2V, ComponentLink1Description=http://www.mouser.com/ds/2/308/1SMF5920B-D-108688.pdf?src-supplier=Mouser, ComponentLink1URL=http://www.mouser.com/ds/2/308/1SMF5920B-D-108688.pdf?src-supplier=Mouser, ComponentLink2Description=http://components.arrow.com/part/dataview/50999384S92509N5236?src-supplier=Arrow, ComponentLink2URL=http://components.arrow.com/part/dataview/50999384S92509N5236?src-supplier=Arrow, ComponentLink3Description=http://www.onsemi.com/pub/Collateral/1SMF5920B-D.PDF?src-supplier=Digi-Key, ComponentLink3URL=http://www.onsemi.com/pub/Collateral/1SMF5920B-D.PDF?src-supplier=Digi-Key, ComponentLink4Description=http://www.onsemi.com/pub_link/Collateral/1SMF5920B-D.PDF?src-supplier=Avnet, ComponentLink4URL=http://www.onsemi.com/pub_link/Collateral/1SMF5920B-D.PDF?src-supplier=Avnet, Contact Plating=Tin,Matte, Depth=1.65mm, Direction=Unidirectional, Element Configuration=Single, Impedance=2R, Lead Free="Lead Free", Length=2.7mm, Max Reverse Leakage Current=5uA, Mount="Surface Mount", Number of Pins=2, Packaging="Tape and Reel", Power Dissipation=2.5W, Pricing 1="1=0.46, 10=0.391, 25=0.3652, 100=0.2712, 250=0.2576, 500=0.2117, 1000=0.1721 (USD)", Radiation Hardening=No, Stock 1=1919, Supplier 1=Digi-Key, Voltage Tolerance=5%
IC1: "Integrated Circuit", Manufacturer_Name=STMicroelectronics, Datasheet Link=https://media.digikey.com/pdf/Data%20Sheets/ST%20Microelectronics%20PDFS/STM32G071_Rev1_DS.pdf, Height=0.6mm, Manufacturer_Part_Number=STM32G071RBI6
J: "2.5 mm, Stereo, Right Angle, Surface Mount (SMT), Audio Jack Connector", Package=None, Availability=Unavailable, MF="CUI Devices", MP=SJ2-25964A-SMT-TR, Price=None, SnapEDA_Link=https://www.snapeda.com/parts/SJ2-25964A-SMT-TR/CUI%20Devices/view-part/1316417/?ref=snap
J1: library part "Net Tie Line", ClassName="Net Tie"
L1: "1µH Shielded Molded Inductor 5A 24mOhm Max Nonstandard", Case Code (Imperial)=1212, Case Code (Metric)=3630, Current Rating=5A, DC Resistance (DCR)=24mR, Inductance=1uH, Inductance Tolerance=20%, Manufacturer="Vishay Dale", Manufacturer Part Number=IHLP1212BZER1R0M11, Max Operating Temperature=125°C, Min Operating Temperature=-55°C, Package Quantity=3000, Saturation Current=4.5A, Self Resonant Frequency=75MHz, Supplier Part Number 1=541-1319-1-ND, Test Frequency=100kHz, Case/Package=1212, ComponentLink1Description=http://www.mouser.com/ds/2/427/lp12bz11-244380.pdf?src-supplier=Mouser, ComponentLink1URL=http://www.mouser.com/ds/2/427/lp12bz11-244380.pdf?src-supplier=Mouser, ComponentLink2Description=http://www.vishay.com/docs/34289/lp12bz11.pdf?src-supplier=Digi-Key, ComponentLink2URL=http://www.vishay.com/docs/34289/lp12bz11.pdf?src-supplier=Digi-Key, ComponentLink3Description=http://www.vishay.com/docs/34289/lp12bz11.pdf?src-supplier=Avnet, ComponentLink3URL=http://www.vishay.com/docs/34289/lp12bz11.pdf?src-supplier=Avnet, ComponentLink4Description=http://www.farnell.com/datasheets/652599.pdf?src-supplier=Element14, ComponentLink4URL=http://www.farnell.com/datasheets/652599.pdf?src-supplier=Element14, ComponentLink5Description=http://www.vishay.com/docs/34289/lp12bz11.pdf?src-supplier=Avnet+Europe, ComponentLink5URL=http://www.vishay.com/docs/34289/lp12bz11.pdf?src-supplier=Avnet+Europe, ComponentLink6Description=https://www.verical.com/server-webapp/html/getDatasheet?partID=180380&src-supplier=Verical, ComponentLink6URL=https://www.verical.com/server-webapp/html/getDatasheet?partID=180380&src-supplier=Verical, Contact Plating=Tin, Core Material=Metal,Composite, Depth=3.2mm, Height=2mm, Height - Seated (Max)=0.079inch, Lead Free="Lead Free", Length=3.6mm, Max DC Current=5A, Military Standard=Not, Mount="Surface Mount", Number of Pins=2, Packaging="Tape and Reel", Pricing 1="1=1.39, 10=1.287, 25=1.188, 50=0.99, 100=0.9306, 250=0.8316, 500=0.7128, 1000=0.6336 (USD)", Radiation Hardening=No, REACH SVHC=Unknown, RMS Current (Irms)=5A, Shielding=Shielded, Stock 1=70286, Supplier 1=Digi-Key, Termination=SMD/SMT, Tolerance=20%, Width=0.118inch
P1: library part "CONN 2012670005 RCP USB3.1 TYPEC 24P SMD RA", "USB-C (USB TYPE-C) USB 3.2 Gen 2 (USB 3.1 Gen 2, Superspeed + (USB 3.1)) Receptacle Connector 24 Position Surface Mount, Right Angle; Through Hole", Current Rating=5A, Flammability Rating="UL94 V-0", Insulation Color=Black, Manufacturer=Molex, Manufacturer Part Number=201267-0005, Max Operating Temperature=105°C, Min Operating Temperature=-40°C, Supplier Part Number 1=WM17992CT-ND, Voltage Rating=30V, ComponentLink1Description=https://www.molex.com/pdm_docs/sd/2012670005_sd.pdf?src-supplier=Digi-Key, ComponentLink1URL=https://www.molex.com/pdm_docs/sd/2012670005_sd.pdf?src-supplier=Digi-Key, ComponentLink2Description=http://www.farnell.com/datasheets/2722545.pdf?src-supplier=Element14, ComponentLink2URL=http://www.farnell.com/datasheets/2722545.pdf?src-supplier=Element14, ComponentLink3Description=http://www.farnell.com/datasheets/2722545.pdf?src-supplier=Newark, ComponentLink3URL=http://www.farnell.com/datasheets/2722545.pdf?src-supplier=Newark, ComponentLink4Description=https://www.molex.com/pdm_docs/pk/2012670005-PK1.pdf?src-supplier=Digi-Key, ComponentLink4URL=https://www.molex.com/pdm_docs/pk/2012670005-PK1.pdf?src-supplier=Digi-Key, ComponentLink5Description=http://www.farnell.com/datasheets/2722545.pdf?src-supplier=Farnell, ComponentLink5URL=http://www.farnell.com/datasheets/2722545.pdf?src-supplier=Farnell, Connector Type=USB, Contact Plating=Gold, Gender=Receptacle, Mating Cycles=20000, Mount="Surface Mount,Through Hole", Number of Contacts=24, Number of Ports=1, Packaging="Tape and Reel", Pricing 1="1=2.34, 10=1.997, 100=1.6496 (USD)", Shielding=Shielded, Stock 1=2580, Supplier 1=Digi-Key, Termination=Solder
P2: library part JST_S5B-ZR-SM4A-TF(LF)(SN), "Connector Header Through Hole, Right Angle 4 position 0.059\" (1.50mm)", Color=White, Contact Resistance=30mR, Current Rating=1A, Flammability Rating="UL94 V-0", Housing Color=Beige, Insulation Color=Natural, Insulation Resistance=500MR, Manufacturer=JST, Manufacturer Part Number=S4B-ZR(LF)(SN), Max Operating Temperature=85°C, Max Voltage Rating (AC)=50V, Min Operating Temperature=-25°C, Body Plating=Tin, ComponentLink1Description=https://www.verical.com/server-webapp/html/getDatasheet?partID=763273&src-supplier=Verical, ComponentLink1URL=https://www.verical.com/server-webapp/html/getDatasheet?partID=763273&src-supplier=Verical, ComponentLink2Description=https://www.verical.com/server-webapp/html/getDatasheet?partID=640380&src-supplier=Verical, ComponentLink2URL=https://www.verical.com/server-webapp/html/getDatasheet?partID=640380&src-supplier=Verical, ComponentLink3Description=http://www1.futureelectronics.com/doc/JST/S4B-ZR(LF)(SN).pdf?src-supplier=Future+Electronics, ComponentLink3URL=http://www1.futureelectronics.com/doc/JST/S4B-ZR(LF)(SN).pdf?src-supplier=Future+Electronics, ComponentLink4Description=http://www.jst-mfg.com/product/pdf/eng/eZH.pdf?src-supplier=Digi-Key, ComponentLink4URL=http://www.jst-mfg.com/product/pdf/eng/eZH.pdf?src-supplier=Digi-Key, ComponentLink5Description=http://www.farnell.com/datasheets/80556.pdf?src-supplier=Element14, ComponentLink5URL=http://www.farnell.com/datasheets/80556.pdf?src-supplier=Element14, ComponentLink6Description=https://www.verical.com/server-webapp/html/getDatasheet?partID=703398&src-supplier=Verical, ComponentLink6URL=https://www.verical.com/server-webapp/html/getDatasheet?partID=703398&src-supplier=Verical, Connector Type="Header,Male Pin", Contact Material=Brass,Tin,Copper, Contact Mating Length=0.094inch, Contact Plating=Tin,Copper, Contact Shape=Circular, Depth=6mm, Fastening Type=Detent, Gender=Male, Height=7.2mm, Housing Material=Polyamide, Insulation Material=Nylon, Lead Free="Lead Free", Lead Pitch=1.5mm, Length=7.5mm, Material=Nylon, Max Current Rating=1A, Max Voltage Rating (DC)=50V, Mount="Through Hole", Number of Contacts=4, Number of Pins=4, Number of Positions=4, Number of Rows=1, Orientation="Right Angle", Packaging=Bulk, Panel Thickness=3.5mm, Pitch=1.5mm, REACH SVHC="No SVHC", Stock 1=0, Supplier 1=Arrow, Supplier Part Number 1=S4B-ZR(LF)(SN), Termination=Solder, Voltage Rating=50V, Voltage Rating (AC)=50V, Voltage Rating (DC)=50V, Width=3.5mm
P3 P4: library part "CONN FFC FPC TOP 5POS 0.50MM R/A", "5 Position FFC, FPC Connector Contacts, Top 0.020\" (0.50mm) Surface Mount, Right Angle", Contact Resistance=40mR, Current Rating=500mA, Flammability Rating="UL94 V-0", Manufacturer=Molex, Manufacturer Part Number=0545500571, Max Operating Temperature=85°C, Min Operating Temperature=-20°C, Package Quantity=1, Supplier Part Number 1=WM8824CT-ND, Voltage Rating=50V, Actuator Material=Polyphenylene, ComponentLink1Description=http://www.molex.com/webdocs/datasheets/pdf/en-us/0545500571_FFC_FPC_CONNECTORS.pdf?src-supplier=Avnet, ComponentLink1URL=http://www.molex.com/webdocs/datasheets/pdf/en-us/0545500571_FFC_FPC_CONNECTORS.pdf?src-supplier=Avnet, Contact Material=Bronze, Contact Plating=Gold, Depth=5mm, Housing Material=Polymer, Length=7.7mm, Mount="Surface Mount", Number of Positions=5, Number of Rows=1, Orientation="Right Angle", Packaging="Tape and Reel", pin_1=SCL, pin_2=SDA, pin_3=VDD, pin_4=GPIO, pin_5=GND, Pitch=0.02inch, Pricing 1="1=0.98, 10=0.808, 100=0.673, 1000=0.5384 (USD)", Radiation Hardening=No, Stock 1=20865, Supplier 1=Digi-Key, Termination=Solder, Wire/Cable Type=Straight
P16: library part JST_S5B-ZR-SM4A-TF(LF)(SN), "Connector Header SMD, Right Angle 4 position 0.059\" (1.50mm)", Color=White, Contact Resistance=30mR, Current Rating=1A, Flammability Rating="UL94 V-0", Housing Color=Beige, Insulation Color=Natural, Insulation Resistance=500MR, Manufacturer=JST, Manufacturer Part Number=S4B-ZR(LF)(SN), Max Operating Temperature=85°C, Max Voltage Rating (AC)=50V, Min Operating Temperature=-25°C, Supplier Part Number 1=455-2774-1-ND, Body Plating=Tin, ComponentLink1Description=https://www.verical.com/server-webapp/html/getDatasheet?partID=763273&src-supplier=Verical, ComponentLink1URL=https://www.verical.com/server-webapp/html/getDatasheet?partID=763273&src-supplier=Verical, ComponentLink2Description=https://www.verical.com/server-webapp/html/getDatasheet?partID=640380&src-supplier=Verical, ComponentLink2URL=https://www.verical.com/server-webapp/html/getDatasheet?partID=640380&src-supplier=Verical, ComponentLink3Description=http://www1.futureelectronics.com/doc/JST/S4B-ZR(LF)(SN).pdf?src-supplier=Future+Electronics, ComponentLink3URL=http://www1.futureelectronics.com/doc/JST/S4B-ZR(LF)(SN).pdf?src-supplier=Future+Electronics, ComponentLink4Description=http://www.jst-mfg.com/product/pdf/eng/eZH.pdf?src-supplier=Digi-Key, ComponentLink4URL=http://www.jst-mfg.com/product/pdf/eng/eZH.pdf?src-supplier=Digi-Key, ComponentLink5Description=http://www.farnell.com/datasheets/80556.pdf?src-supplier=Element14, ComponentLink5URL=http://www.farnell.com/datasheets/80556.pdf?src-supplier=Element14, ComponentLink6Description=https://www.verical.com/server-webapp/html/getDatasheet?partID=703398&src-supplier=Verical, ComponentLink6URL=https://www.verical.com/server-webapp/html/getDatasheet?partID=703398&src-supplier=Verical, Connector Type="Header,Male Pin", Contact Material=Brass,Tin,Copper, Contact Mating Length=0.094inch, Contact Plating=Tin,Copper, Contact Shape=Circular, Depth=6mm, Fastening Type=Detent, Gender=Male, Height=7.2mm, Housing Material=Polyamide, Insulation Material=Nylon, Lead Free="Lead Free", Lead Pitch=1.5mm, Length=7.5mm, Material=Nylon, Max Current Rating=1A, Max Voltage Rating (DC)=50V, Mount="Through Hole", Number of Contacts=4, Number of Pins=4, Number of Positions=4, Number of Rows=1, Orientation="Right Angle", Packaging=Bulk, Panel Thickness=3.5mm, Pitch=1.5mm, REACH SVHC="No SVHC", Stock 1=0, Supplier 1=Digi-Key, Termination=Solder, Voltage Rating=50V, Voltage Rating (AC)=50V, Voltage Rating (DC)=50V, Width=3.5mm